# Altium PCB PowerAmplifier_Front.PcbDoc
Units mm, origin at the board's own origin, x right, y up, seen from the top; angles counter-clockwise.
Board outline 99.95 x 99.95 mm, 2 copper layers (Top Layer, Bottom Layer); 49 components, 27 nets, 123 pads, 0 vias.
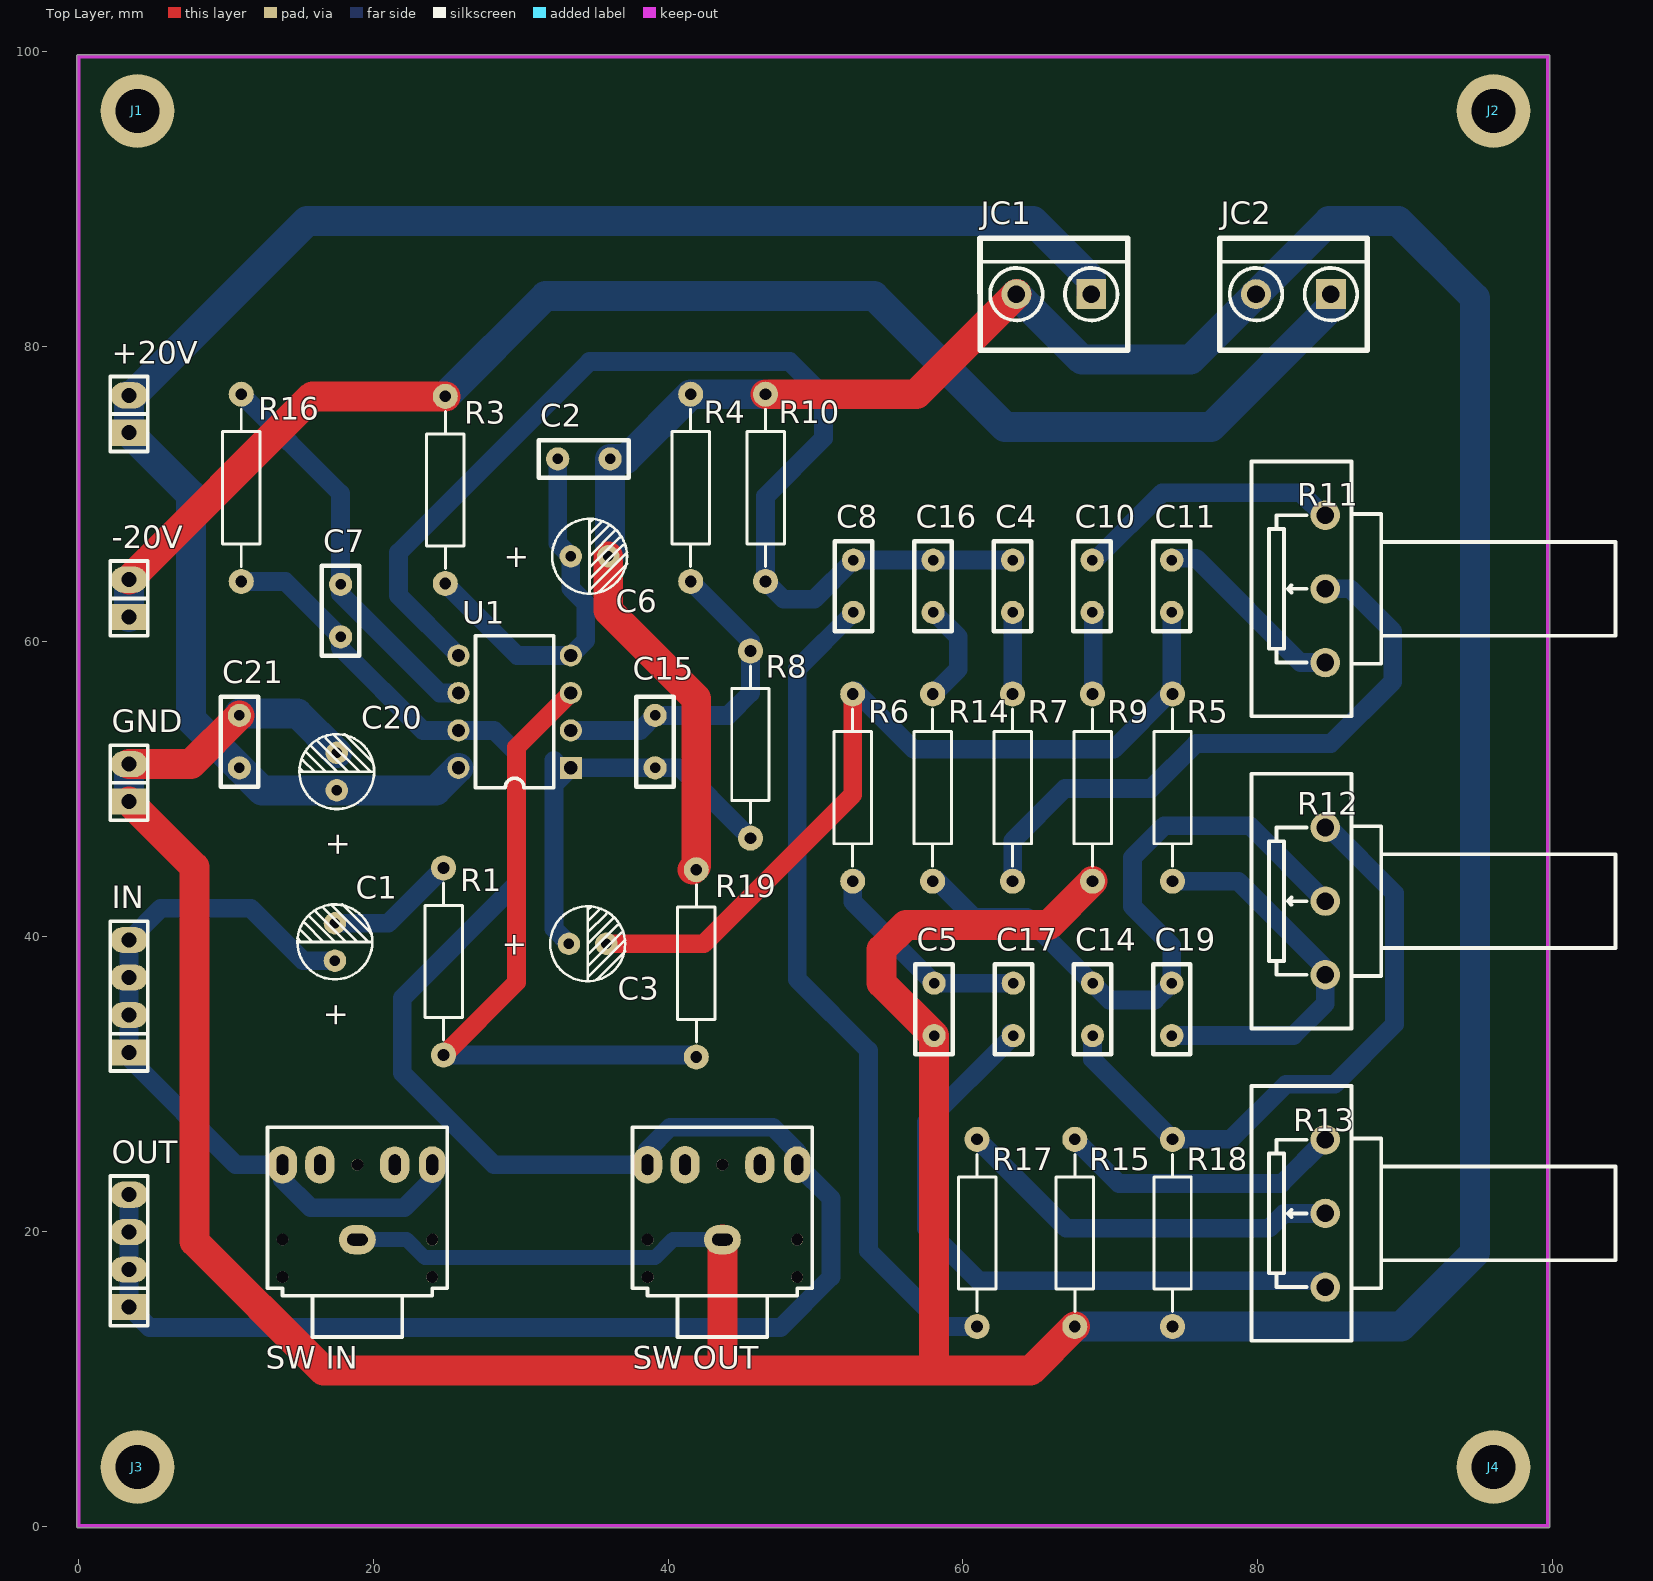
[diagram p0: Top Layer view]
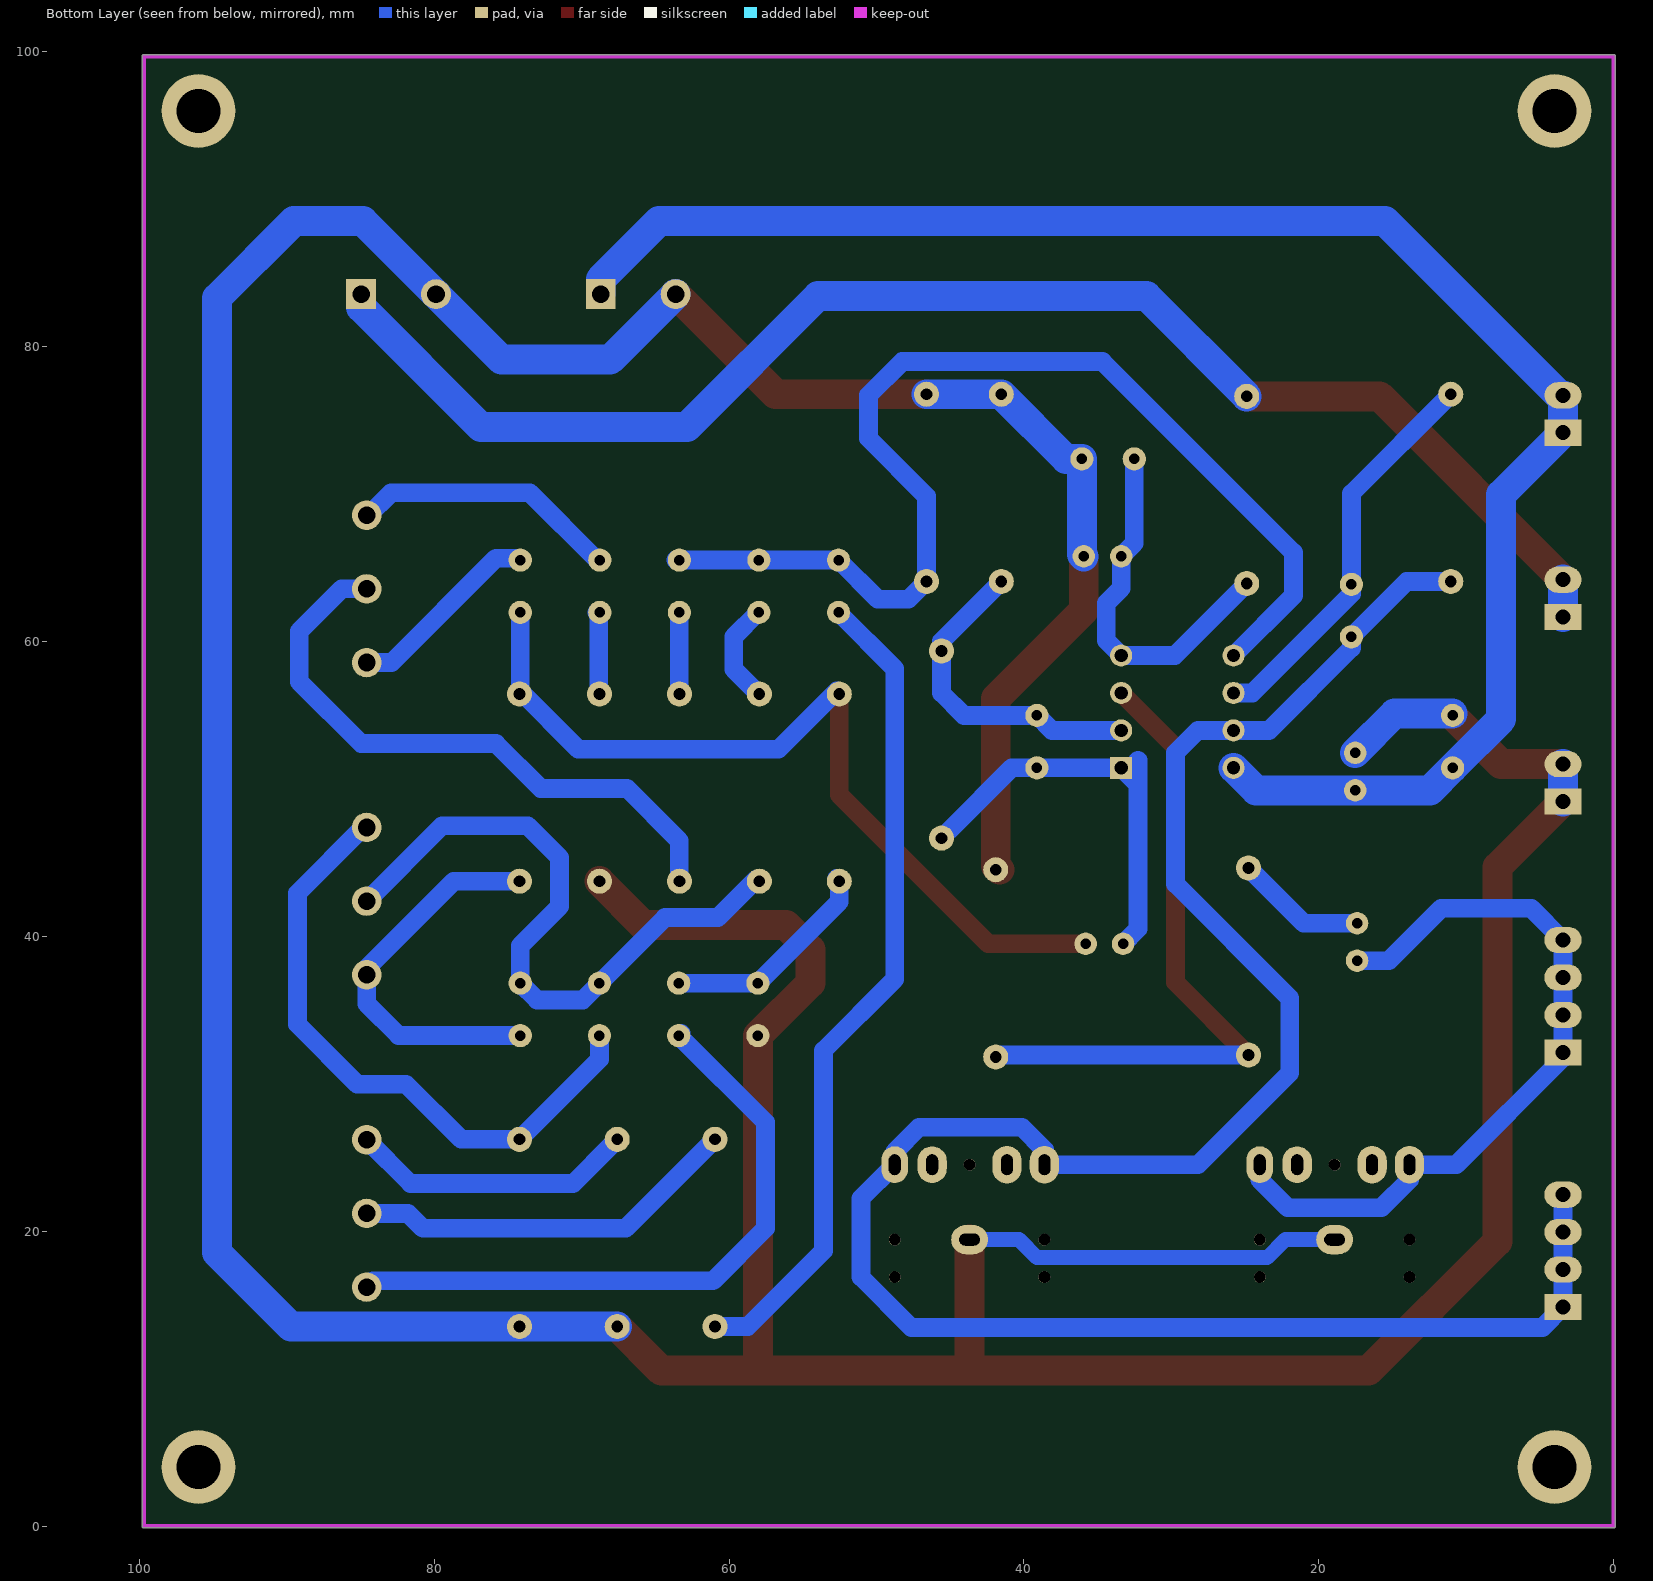
[diagram p1: Bottom Layer view, seen from below]

## Layer stack, top to bottom
Top Solder: solder mask 0.0102, Solder Resist, Dk 3.5
Top Layer: signal copper 0.0356
Dielectric 1: dielectric 0.32, FR-4, Dk 4.8
Bottom Layer: signal copper 0.0356
Bottom Solder: solder mask 0.0102, Solder Resist, Dk 3.5

## Board outline
0,-0.127 cw(c0,0) -0.127,0 -0.127,99.695 cw(c0,99.695) 0,99.822 99.695,99.822 cw(c99.695,99.695) 99.822,99.695 99.822,0 cw(c99.695,0) 99.695,-0.127

## Design rules (kind name [scope] priority, off if disabled: settings)
Clearance [All] p1: gap=0.254
PolygonConnect [All] p1: connectstyle=Relief reliefconductorwidth=0.254 reliefentries=4 polygonreliefangle="90 Angle" airgapwidth=0.254
RoutingVias [All] p1: holewidth=0.711 width=1.27 viastyle="Through Hole" minholewidth=0.711 minwidth=1.27 maxholewidth=0.711 maxwidth=1.27
SolderMaskExpansion [All] p1: expansion=0.102
Width +20V [InNet('+20V')] p1: maxlimit=2.032 minlimit=1.27 preferedwidth=2.032
Width -20V [InNet('-20V')] p2: maxlimit=2.032 minlimit=1.27 preferedwidth=2.032
Width GND [InNet('GND')] p3: maxlimit=2.032 minlimit=0.762 preferedwidth=2.032
Width [All] p4: maxlimit=1.27 minlimit=0.762 preferedwidth=1.27
30 further rules are at their usual default settings.

## Components (designator, comment, footprint, x,y, rotation, side; value= is the part's Value field where it differs from the comment)
+20V "CON2" sip-2 3.429,74.168 r90 top
-20V "CON2" sip-2 3.429,61.658 r90 top
C1 "10uf" RB.1/.2 17.399,38.354 r90 top
C2 "104" RAD0.15 34.036,72.39 r0 top
C3 "22uf" RB.1/.2 33.274,39.497 r0 top
C4 "224" RAD0.15 63.373,63.5 r90 top
C5 "333" RAD0.15 58.046,35.306 r270 top
C6 "22uf" RB.1/.2 33.401,65.786 r0 top
C7 "10pf" RAD0.15 17.78,62.357 r270 top
C8 "224" RAD0.15 52.578,63.5 r90 top
C10 "223" RAD0.15 68.77,64.008 r270 top
C11 "223" RAD0.15 74.168,64.008 r270 top
C14 "683" RAD0.15 68.794,35.306 r270 top
C15 "10pf" RAD0.15 39.116,53.467 r270 top
C16 "224" RAD0.15 57.975,63.5 r90 top
C17 "333" RAD0.15 63.42,35.306 r270 top
C19 "683" RAD0.15 74.168,34.798 r90 top
C20 "22uf" RB.1/.2 17.526,49.911 r90 top
C21 "102" RAD0.15 10.922,52.959 r90 top
GND "CON2" sip-2 3.429,49.149 r90 top
IN "CON4" sip-4 3.429,32.131 r90 top
J1 "3.0MM" 3.0MM 4,96 r0 top
J2 "3.0MM" 3.0MM 96,96 r0 top
J3 "3.0MM" 3.0MM 4,4 r0 top
J4 "3.0MM" 3.0MM 96,4 r0 top
JC1 "CON_2PIN" CON_2PIN 66.167,83.566 r0 top
JC2 "CON_2PIN" CON_2PIN 82.423,83.566 r0 top
OUT "CON4" sip-4 3.429,14.859 r90 top
R1 "1K" AXIL0.5 24.519,38.623 r270 top
R3 "220" AXIL0.5 24.638,70.612 r270 top
R4 "1k" AXIL0.5 41.783,70.104 r90 top
R5 "1k" AXIL0.5 73.97,50.419 r270 top
R6 "2k" AXIL0.5 52.276,50.419 r270 top
R7 "4.7k" AXIL0.5 63.623,49.769 r90 top
R8 "2k" AXIL0.5 45.339,53.34 r270 top
R9 "1K" AXIL0.5 68.547,50.419 r270 top
R10 "10k" AXIL0.5 46.863,70.104 r90 top
R11 "10k" WH148-1-G15 84.582,63.576 r90 top
R12 "10k" WH148-1-G15 84.582,42.393 r90 top
R13 "10k" WH148-1-G15 84.582,21.209 r90 top
R14 "4.7k" AXIL0.5 57.699,50.419 r270 top
R15 "1k" AXIL0.5 67.842,19.558 r90 top
R16 "10k" AXIL0.5 10.795,70.754 r270 top
R17 "4.7k" AXIL0.5 61.214,19.558 r90 top
R18 "1k" AXIL0.5 74.47,19.558 r90 top
R19 "15k" AXIL0.5 42.164,37.846 r90 top
"SW IN" "POHENJACK STEREO SW" "POHENJACK STEREO SW" 18.796,21.844 r90 top
"SW OUT" "POHENJACK STEREO SW" "POHENJACK STEREO SW" 43.561,21.844 r90 top
U1 "NE5532" NE5532 29.718,55.372 r180 top

## Footprints (in the part's own frame and the unit in brackets; to place one, negate y for a bottom-side part, rotate by r counter-clockwise, add the part's x,y. Pads: shape width x height; smd on the part's side, far side on the other; paste and mask are expansions set on the pad)
3.0MM [mm]
  round 5 hole 3: 1(0,0)
AXIL0.5 [mm]
  round 1.7 hole 0.8: 1(-6.025,0.25) 2(6.675,0.25)
  silkscreen extent -5.01,-1.02 5.66,1.52
CON_2PIN [mil]
  rect 80x80 hole 47.24: 1(100,0)
  round 80 hole 47.24: 2(-100,0)
  silkscreen extent -197,-150 197,150, body extent -190,-171 203,144, height 433
NE5532 [mm]
  rect 1.5x1.5 hole 0.9: 1(-3.683,3.937)
  round 1.5 hole 0.9: 2(-3.683,1.397) 3(-3.683,-1.143) 4(-3.683,-3.683) 5(3.937,-3.683) 6(3.937,-1.143) 7(3.937,1.397) 8(3.937,3.937)
  silkscreen extent -2.52,-5.02 2.78,5.28
"POHENJACK STEREO SW" [mm]
  oval 2.54x2 hole 0.8 slot 1.4 at 0 deg: 1(2.667,4.953) 2(2.667,2.413)
  oval 2.5x2 hole 0.8 slot 1.4 at 0 deg: 3(2.667,-2.667)
  oval 2.5x1.8 hole 0.8 slot 1.4 at 0 deg: 4(2.667,-5.207)
  oval 2x2.5 hole 0.8 slot 1.4 at 90 deg: 5(-2.413,-0.127)
  round 0.8 hole 0.8: 6(-4.953,-5.207) 6(-4.953,4.953) 6(-2.413,4.953) 6(-2.413,-5.207) 6(2.667,-0.127)
  silkscreen extent -9.02,-6.22 5.21,5.97
RAD0.15 [mil]
  round 62 hole 28: 1(-60,0) 2(80,0)
  silkscreen extent -110,-50 130,50
RB.1/.2 [mil]
  round 60 hole 28: 1(0,0) 2(100,0)
  silkscreen extent -50,-100 150,100
sip-2 [mil]
  rect 70x100 hole 40: 1(0,0)
  oval 70x98.42 hole 40: 2(100,0)
  silkscreen extent -50,-50 150,50
sip-4 [mil]
  rect 70x100 hole 40: 1(0,0)
  oval 70x100 hole 40: 2(100,0) 3(200,0) 4(300,0)
  silkscreen extent -50,-50 350,50
WH148-1-G15 [mm] "单联电位器，脚距：5mm，柄长：15mm"
  round 2 hole 1.2: 1(-5,0) 2(0,0) 3(5,0)
  silkscreen extent -8.64,-19.68 8.64,5, body extent -8.45,-19.5 8.45,4.8, height 20.95

## Part data
+20V -20V GND IN OUT: "Connector"
C1 C3 C6 C20: library part CAP_E, "Electrolytic Capacitor"
C2 C11 C15 C16 C21: library part Cap1
C4 C5 C7 C8 C10 C14 C17 C19: library part CAP1
R1 R3 R4 R5 R6 R7 R8 R9 R10 R14 R15 R16 R17 R18 R19: library part 电阻
R11 R12 R13: library part 滑动变阻器

## Nets (pads, with @x,y where several pads share a name; then routed paths per layer and width w, separated by ;. In a path a pad name is that pad's centre, name@x,y a point inside that pad or via, vN(x,y) a via of type N, cw(c..) or ccw(c..) an arc to the next point about the centre after c; other vN are vias at no path point)
+20V: +20V.1 +20V.2 C20.1 C21.1 JC1.1 U1.8 | length 117.6
  Bottom Layer w2.032: +20V.1@3.683,74.168 +20V.1 ; U1.8 24.257,49.911 C20.1 12.446,49.911 C21.1 7.62,54.737 7.62,69.977 +20V.1 ; JC1.1 68.707,84.582 64.77,88.519 15.494,88.519 3.683,76.708 +20V.2 +20V.1
-20V: -20V.1 -20V.2 JC2.1 R3.1 | length 100
  Top Layer w2.032: -20V.2 15.867,76.637 R3.1
  Bottom Layer w2.032: -20V.1 -20V.2 ; R3.1 31.69,83.439 53.975,83.439 62.865,74.549 76.835,74.549 84.963,82.677 JC2.1
GND: "SW IN.5" "SW OUT.5" C2.2 C5.2 C6.2 C20.2 C21.2 GND.1 GND.2 JC1.2 JC2.2 R4.2 R9.2 R10.2 R15.1 R18.1 R19.2 | length 392.1
  Top Layer w2.032: GND.1 7.874,44.704 7.874,19.304 16.637,10.541 43.688,10.541 ; GND.2 7.62,51.689 C21.2 ; C6.2 35.941,62.103 41.91,56.134 41.91,44.779 R19.2@41.652,44.521 ; 43.688,19.431 43.688,10.541 ; R10.2 56.84,76.779 JC1.2 ; R15.1 64.6,10.541 57.912,10.541 ; R9.2 65.82,40.767 56.134,40.767 54.483,39.116 54.483,36.837 C5.2 58.046,10.675 57.912,10.541 ; 43.688,10.541 57.912,10.541
  Bottom Layer w1.016: 18.923,19.431 22.27,19.431 23.495,18.206 39.116,18.206 40.341,19.431 43.688,19.431
  Bottom Layer w2.032: GND.1 GND.2 ; C21.2@10.922,55.118 14.859,55.118 C20.2 ; C6.2 36.068,65.913 C2.2 37.144,72.39 R4.2 R10.2 ; JC1.2 68.072,79.121 75.438,79.121 JC2.2 84.836,88.519 89.535,88.519 94.742,83.312 94.742,18.542 89.733,13.533 R18.1 R15.1
NetC1_1: "SW IN.1" "SW IN.4" C1.1 IN.1 IN.2 IN.3 IN.4 | length 51.5
  Bottom Layer w1.27: C1.1 15.24,38.354 11.684,41.91 5.588,41.91 IN.4 IN.3 IN.2 IN.1 3.429,31.75 10.668,24.511 13.843,24.511 13.843,23.495 15.748,21.59 22.098,21.59 24.003,23.495 24.003,24.511
NetC1_2: C1.2 R1.1 | length 8.9
  Bottom Layer w1.27: C1.2 21.015,40.894 R1.1
NetC2_1: C2.1 C6.1 R3.2 U1.4 | length 25.1
  Bottom Layer w1.27: R3.2 29.77,59.055 U1.4 34.417,60.071 34.417,62.611 33.401,63.627 C6.1 32.512,66.675 C2.1
NetC3_1: C3.1 C15.2 R8.2 U1.1 | length 27.7
  Bottom Layer w1.27: 32.258,51.943 32.258,40.513 C3.1 ; 32.385,50.419 U1.1 C15.2 40.819,51.435 R8.2@45.017,47.236
NetC3_2: C3.2 C11.2 R5.1 R6.1 | length 57.5
  Top Layer w1.27: C3.2 42.418,39.497 52.526,49.605 R6.1
  Bottom Layer w1.27: R6.1@52.705,56.649 56.649,52.705 70.224,52.705 74.168,56.649 C11.2@74.168,61.722
NetC4_1: C4.1 R7.2 | length 5.3
  Bottom Layer w1.27: R7.2@63.373,56.649 C4.1
NetC4_2: C4.2 C8.2 C16.2 R10.1 U1.5 | length 76.7
  Bottom Layer w1.27: U1.5 21.717,63.119 21.717,66.04 34.671,78.994 48.26,78.994 50.546,76.708 50.546,73.787 46.613,69.854 R10.1 47.827,62.865 49.911,62.865 C8.2 C8.2@52.705,65.532 ; C8.2@52.578,65.405 C8.2@52.705,65.532 ; C16.2@58.039,65.532 C16.2 C8.2@52.705,65.532 ; C16.2@58.166,65.532 C4.2 C4.2@63.627,65.532
NetC5_1: C5.1 C17.1 R6.2 | length 14.8
  Bottom Layer w1.27: R6.2 52.526,42.35 C5.1 C17.1 ; R6.2@52.705,43.744 R6.2@52.705,43.949
NetC7_1: C7.1 R16.1 U1.6 | length 27.1
  Bottom Layer w1.27: R16.1 17.78,70.044 C7.1 17.78,63.246 24.511,56.515 U1.6
NetC7_2: "SW OUT.1" "SW OUT.4" C7.2 OUT.1 OUT.2 OUT.3 OUT.4 R16.2 U1.7 | length 147.6
  Bottom Layer w1.27: OUT.4 OUT.3 OUT.2 OUT.1 4.826,13.462 47.625,13.462 51.054,16.891 51.054,22.225 48.768,24.511 48.768,25.4 47.117,27.051 40.132,27.051 38.608,25.527 38.608,24.823 ; R16.2 14.026,64.079 C7.2 17.78,59.563 23.368,53.975 U1.7 28.194,53.975 29.591,52.578 ; 29.718,52.451 29.718,43.561 21.971,35.814 21.971,30.734 28.194,24.511 38.608,24.511 38.608,24.823 ; 38.706,24.921 38.608,24.823 ; 48.514,24.295 48.768,24.041
NetC8_1: C8.1 R17.1 | length 56.4
  Bottom Layer w1.27: C8.1 48.768,58.166 48.768,37.084 53.594,32.258 53.594,18.669 58.73,13.533 R17.1
NetC10_1: C10.1 R11.3 | length 18.2
  Bottom Layer w1.27: C10.1@68.961,65.532 73.533,70.104 82.931,70.104 R11.3@84.582,68.453
NetC10_2: C10.2 R9.1 | length 5.4
  Bottom Layer w1.27: R9.1@68.834,56.649 68.834,61.849 C10.2@68.961,61.976
NetC11_1: C11.1 R11.1 | length 13.3
  Bottom Layer w1.27: C11.1@74.168,65.659 75.819,65.659 82.902,58.576 R11.1
NetC14_1: C14.1 C19.2 R12.2 R14.2 | length 45.6
  Bottom Layer w1.27: R14.2@58.162,43.886 60.773,41.275 64.349,41.275 C14.1 69.937,35.687 73.025,35.687 C19.2 74.168,39.37 71.501,42.037 71.501,45.339 73.66,47.498 79.477,47.498 R12.2
NetC14_2: C14.2 R12.3 R18.2 | length 43
  Bottom Layer w1.27: C14.2 68.794,31.659 R18.2 78.176,26.233 81.915,29.972 85.217,29.972 89.281,34.036 89.281,42.926 84.814,47.393 R12.3
NetC15_1: C15.1 R4.1 R8.1 U1.2 | length 22.5
  Bottom Layer w1.27: U1.2 38.1,53.975 C15.1 44.069,54.991 45.589,56.511 R8.1 45.589,60.023 R4.1
NetC16_1: C16.1 R14.1 | length 6.7
  Bottom Layer w1.27: C16.1@58.039,61.976 59.69,60.325 59.69,58.114 R14.1@58.162,56.586
NetC17_2: C17.2 R13.1 | length 44.3
  Bottom Layer w1.27: C17.2@63.27,33.425 63.27,33.123 57.531,27.385 57.531,20.193 61.087,16.637 84.154,16.637 R13.1
NetC19_1: C19.1 R5.2 R12.1 | length 26.5
  Bottom Layer w1.27: C19.1 82.423,33.274 84.582,35.433 R12.1 84.582,37.846 78.684,43.744 R5.2
NetR1_2: R1.2 R19.1 U1.3 | length 45.1
  Top Layer w1.27: R1.2 29.718,36.897 29.718,52.832 U1.3
  Bottom Layer w1.27: R1.2 41.525,31.948 R19.1@41.652,31.821
NetR7_1: R7.1 R11.2 | length 42
  Bottom Layer w1.27: R7.1@63.373,43.949 63.373,46.482 66.929,50.038 72.771,50.038 75.819,53.086 84.963,53.086 89.154,57.277 89.154,60.706 86.284,63.576 R11.2
NetR13_2: R13.2 R17.2 | length 26.6
  Bottom Layer w1.27: R17.2 67.004,20.193 80.772,20.193 81.788,21.209 84.328,21.209 R13.2@84.582,20.955
NetR13_3: R13.3 R15.2 | length 19
  Bottom Layer w1.27: R15.2@67.922,25.903 70.584,23.241 81.614,23.241 R13.3
pads on no net: "SW IN.2" "SW IN.3" "SW IN.6" "SW OUT.2" "SW OUT.3" "SW OUT.6" J1.1 J2.1 J3.1 J4.1

## Keep-outs
Keep-Out Layer:
  lines w0.254: 0,0 0,99.06 0,99.695 99.695,99.695 99.695,0 0,0

## Text inside footprints (layer, text, board x,y; h text height)
C1: Top Overlay "+" at 18.149,33.804 h1.5 r90
C3: Top Overlay "+" at 28.724,38.747 h1.5
C6: Top Overlay "+" at 28.851,65.036 h1.5
C20: Top Overlay "+" at 18.276,45.361 h1.5 r90